# EAGLE board stereo_mix_front (EAGLE 9.5.2)
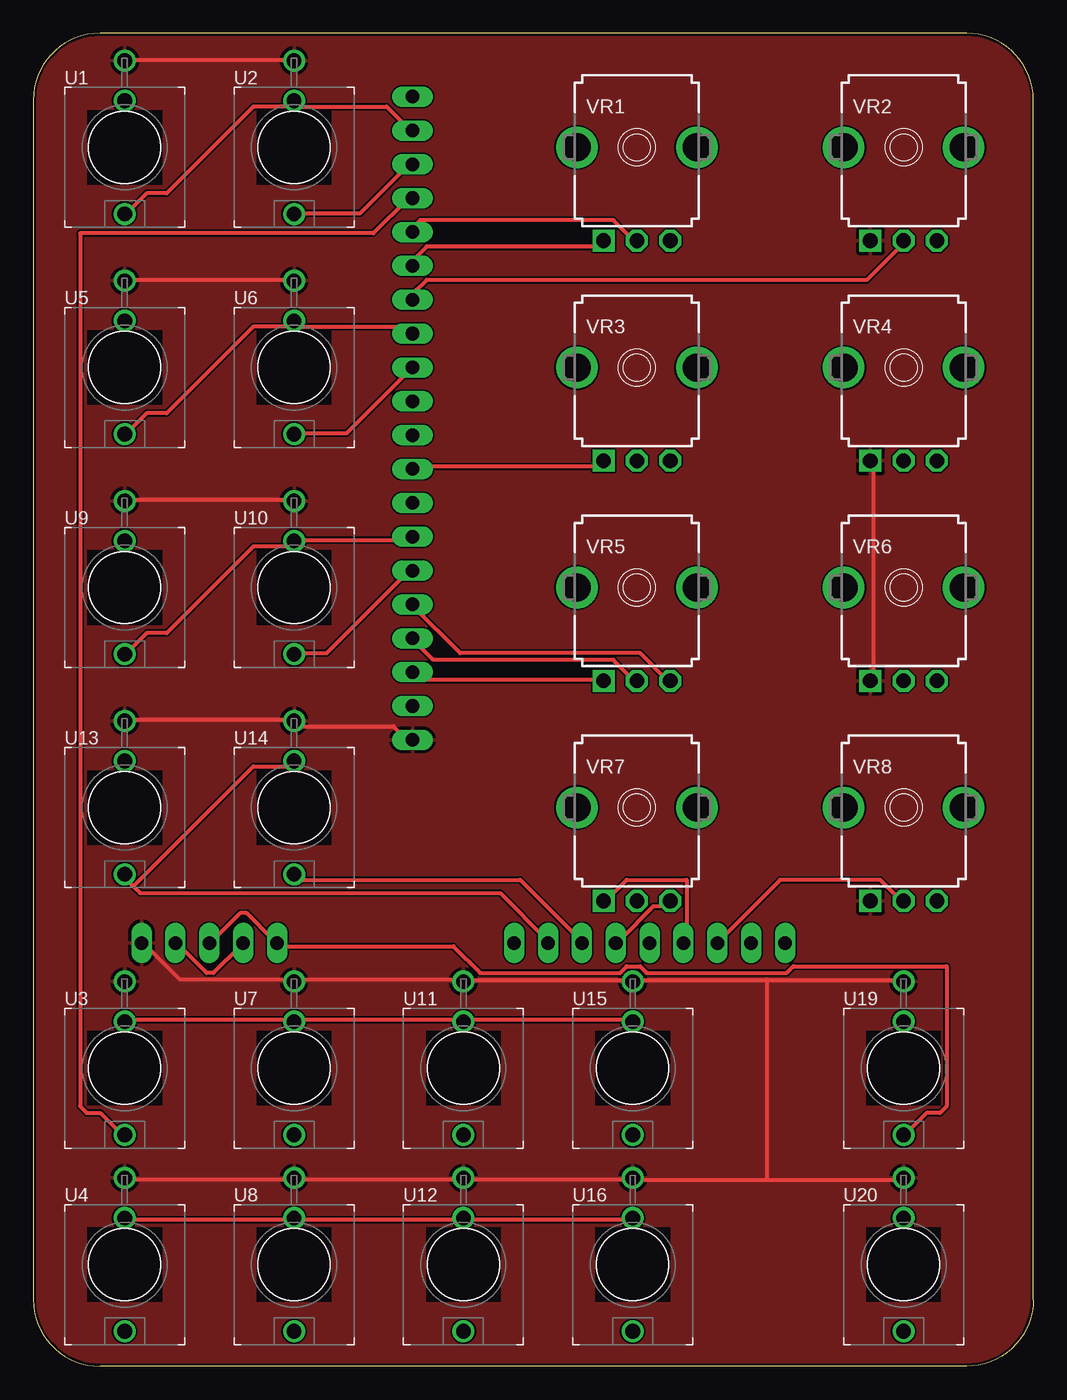
[diagram p0: board, top side]
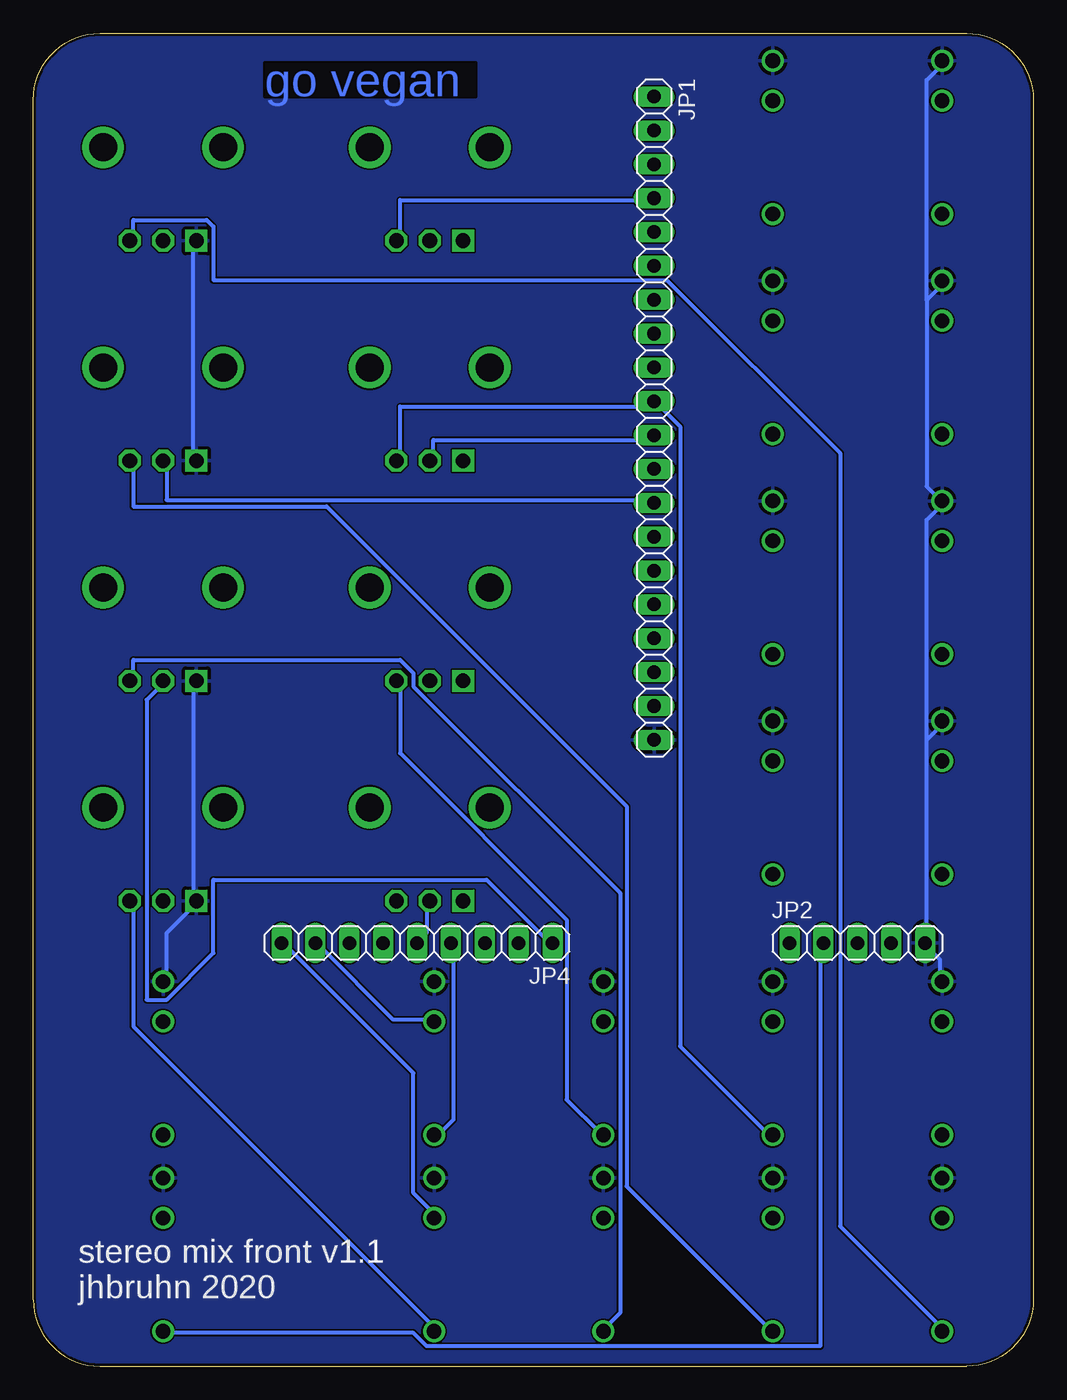
[diagram p1: board, bottom side, seen from below]

Size 75 x 100 mm. Coordinates in mm from the lower left corner, seen from the top.
Outline: 0,95 0,5 arc90 5,0 70,0 arc90 75,5 75,95 arc90 70,100 5,100 arc90 0,95
Copper layers (1*16): Top 0.035559375mm / dielectric 1.6mm / Bottom 0.035559375mm
Design rules "jlcpcb2layer *": minimum track width 12mil, minimum drill 12mil, track to track 5mil, track to pad 5mil, pad to pad 5mil, via to via 5mil, smd to smd 5mil, copper to edge 8mil, drill to drill 6mil, minimum pad ring 5mil, minimum via ring 3mil, stop-mask expansion 2.5mil, vias tented up to drill 0mil, thermal gap 10mil

## Footprints (pad centres in the part's own frame; a part is rotated, then mirrored left to right if it is on the bottom)
1X20 = drill 1.016 long: 1 -24.13,0; 2 -21.59,0; 3 -19.05,0; 4 -16.51,0; 5 -13.97,0; 6 -11.43,0; 7 -8.89,0; 8 -6.35,0; 9 -3.81,0; 10 -1.27,0; 11 1.27,0; 12 3.81,0; 13 6.35,0; 14 8.89,0; 15 11.43,0; 16 13.97,0; 17 16.51,0; 18 19.05,0; 19 21.59,0; 20 24.13,0
1X05 = drill 1.016 long: 1 -5.08,0; 2 -2.54,0; 3 0,0; 4 2.54,0; 5 5.08,0
1X09 = drill 1.016 long: 1 -10.16,0; 2 -7.62,0; 3 -5.08,0; 4 -2.54,0; 5 0,0; 6 2.54,0; 7 5.08,0; 8 7.62,0; 9 10.16,0
WQP-PJ301M-12_JACK = drill 1.1: P$1_TIP 0,5; P$2_SWITCH 0,-3.5; P$3_SLEEVE 0,-6.5
9MM_SNAP-IN_POT = drill 1.1 square: 1 -2.5,-7 | drill 1.1 octagon: 2 0,-7; 3 2.5,-7 | drill 2.1 pad 2.794: CHASSIS1 -4.5,0; CHASSIS2 4.5,0

## Placement (x,y rotation side)
JP1  [1X20]  28.44,71.12 270 bottom
JP2  [1X05]  13.2,31.75 0 bottom
JP4  [1X09]  46.22,31.75 180 bottom
U1  WQP-PJ301M-12_JACK  [WQP-PJ301M-12_JACK]  6.85,91.44 180 top
U2  WQP-PJ301M-12_JACK  [WQP-PJ301M-12_JACK]  19.55,91.44 180 top
U3  WQP-PJ301M-12_JACK  [WQP-PJ301M-12_JACK]  6.85,22.35 180 top
U4  WQP-PJ301M-12_JACK  [WQP-PJ301M-12_JACK]  6.85,7.62 180 top
U5  WQP-PJ301M-12_JACK  [WQP-PJ301M-12_JACK]  6.85,74.93 180 top
U6  WQP-PJ301M-12_JACK  [WQP-PJ301M-12_JACK]  19.55,74.93 180 top
U7  WQP-PJ301M-12_JACK  [WQP-PJ301M-12_JACK]  19.55,22.35 180 top
U8  WQP-PJ301M-12_JACK  [WQP-PJ301M-12_JACK]  19.55,7.62 180 top
U9  WQP-PJ301M-12_JACK  [WQP-PJ301M-12_JACK]  6.85,58.42 180 top
U10  WQP-PJ301M-12_JACK  [WQP-PJ301M-12_JACK]  19.55,58.42 180 top
U11  WQP-PJ301M-12_JACK  [WQP-PJ301M-12_JACK]  32.25,22.35 180 top
U12  WQP-PJ301M-12_JACK  [WQP-PJ301M-12_JACK]  32.25,7.62 180 top
U13  WQP-PJ301M-12_JACK  [WQP-PJ301M-12_JACK]  6.85,41.91 180 top
U14  WQP-PJ301M-12_JACK  [WQP-PJ301M-12_JACK]  19.55,41.91 180 top
U15  WQP-PJ301M-12_JACK  [WQP-PJ301M-12_JACK]  44.95,22.35 180 top
U16  WQP-PJ301M-12_JACK  [WQP-PJ301M-12_JACK]  44.95,7.62 180 top
U19  WQP-PJ301M-12_JACK  [WQP-PJ301M-12_JACK]  65.27,22.35 180 top
U20  WQP-PJ301M-12_JACK  [WQP-PJ301M-12_JACK]  65.27,7.62 180 top
VR1  [9MM_SNAP-IN_POT]  45.27,91.44 0 top
VR2  [9MM_SNAP-IN_POT]  65.27,91.44 0 top
VR3  [9MM_SNAP-IN_POT]  45.27,74.93 0 top
VR4  [9MM_SNAP-IN_POT]  65.27,74.93 0 top
VR5  [9MM_SNAP-IN_POT]  45.27,58.42 0 top
VR6  [9MM_SNAP-IN_POT]  65.27,58.42 0 top
VR7  [9MM_SNAP-IN_POT]  45.27,41.91 0 top
VR8  [9MM_SNAP-IN_POT]  65.27,41.91 0 top

## Library data of the parts
JP1 JP2 JP4 = pinhead
U1-U16 U19 U20 = jhbruhn-physical
VR1-VR8 = jhbruhn-physical; SPICEPREFIX: J

## Nets
1_IN_L: JP1.2 U1.P$1_TIP U2.P$2_SWITCH
1_IN_R: JP1.3 U2.P$1_TIP
1_PAN_ATT_R: JP1.6 VR1.1
1_PAN_ATT_W: JP1.5 VR1.2
1_PAN_CV_IN: JP1.4 U3.P$1_TIP VR1.3
1_VOLUME_CV: JP1.7 VR2.2
2_IN_L: JP1.8 U5.P$1_TIP U6.P$2_SWITCH
2_IN_R: JP1.9 U6.P$1_TIP
2_PAN_ATT_R: JP1.12 VR3.1
2_PAN_ATT_W: JP1.11 VR3.2
2_PAN_CV_IN: JP1.10 U7.P$1_TIP VR3.3
2_VOLUME_CV: JP1.13 VR4.2
3_IN_L: JP1.14 U9.P$1_TIP U10.P$2_SWITCH
3_IN_R: JP1.15 U10.P$1_TIP
3_PAN_ATT_R: JP1.18 VR5.1
3_PAN_ATT_W: JP1.17 VR5.2
3_PAN_CV_IN: JP1.16 U11.P$1_TIP VR5.3
3_VOLUME_CV: JP4.1 VR6.2
4_IN_L: JP4.2 U13.P$1_TIP U14.P$2_SWITCH
4_IN_R: JP4.3 U14.P$1_TIP
4_PAN_ATT_R: JP4.6 VR7.1
4_PAN_ATT_W: JP4.5 VR7.2
4_PAN_CV_IN: JP4.4 U15.P$1_TIP VR7.3
4_VOLUME_CV: JP4.7 VR8.2
+12V: JP1.1
-12V: JP1.19
GND: JP1.20 JP2.5 U1.P$3_SLEEVE U2.P$3_SLEEVE U3.P$3_SLEEVE U4.P$3_SLEEVE U5.P$3_SLEEVE U6.P$3_SLEEVE U7.P$3_SLEEVE U8.P$3_SLEEVE U9.P$3_SLEEVE U10.P$3_SLEEVE U11.P$3_SLEEVE U12.P$3_SLEEVE U13.P$3_SLEEVE U14.P$3_SLEEVE U15.P$3_SLEEVE U16.P$3_SLEEVE U19.P$3_SLEEVE U20.P$3_SLEEVE VR2.1 VR4.1 VR6.1 VR8.1
N$13: U8.P$1_TIP VR4.3
N$17: U4.P$1_TIP VR2.3
N$21: U12.P$1_TIP VR6.3
N$28: U16.P$1_TIP VR8.3
OUT_L: JP2.1 JP2.3 U19.P$1_TIP
OUT_R: JP2.2 JP2.4 U20.P$1_TIP
REF_5: JP4.8 U3.P$2_SWITCH U7.P$2_SWITCH U11.P$2_SWITCH U15.P$2_SWITCH
REF_10: JP4.9 U4.P$2_SWITCH U8.P$2_SWITCH U12.P$2_SWITCH U16.P$2_SWITCH

## Tracks (layer width: path | path; a pad name or v marks a point on that pad's centre or on a via)
1_IN_L
  Top 0.305: JP1.2 28,93 26.5,94.5 20,94.5 U2.P$2_SWITCH 19.5,94.5 16.5,94.5 10,88 8.5,88 7,86.5 U1.P$1_TIP
1_IN_R
  Top 0.305: JP1.3 28,90 24.5,86.5 20,86.5 U2.P$1_TIP
1_PAN_ATT_R
  Top 0.305: JP1.6 28.5,83 29.5,84 42.5,84 VR1.1
1_PAN_ATT_W
  Top 0.305: JP1.5 28.5,85.5 29,86 43.5,86 45,84.5 VR1.2
1_PAN_CV_IN
  Top 0.305: U3.P$1_TIP 6.5,17.5 5,19 4,19 3.5,19.5 3.5,85 25.5,85 28,87.5 JP1.4
  Bottom 0.305: JP1.4 28.5,87.5 47.5,87.5 47.5,84.5 VR1.3
1_VOLUME_CV
  Top 0.305: JP1.7 28.5,80.5 29.5,81.5 62.5,81.5 65,84 VR2.2
2_IN_L
  Top 0.305: JP1.8 28,77.5 27.5,78 20,78 U6.P$2_SWITCH 19.5,78 16.5,78 10,71.5 8.5,71.5 7,70 U5.P$1_TIP
2_IN_R
  Top 0.305: JP1.9 28,74.5 23.5,70 20,70 U6.P$1_TIP
2_PAN_ATT_R
  Top 0.305: JP1.12 28.5,67.5 42.5,67.5 VR3.1
2_PAN_ATT_W
  Bottom 0.305: JP1.11 28.5,69.5 45,69.5 45,68 VR3.2
2_PAN_CV_IN
  Bottom 0.305: VR3.3 47.5,68 47.5,72 28.5,72 JP1.10 28,72 26.5,70.5 26.5,24 20,17.5 U7.P$1_TIP
2_VOLUME_CV
  Bottom 0.305: JP1.13 28.5,65 65,65 65,67.5 VR4.2
3_IN_L
  Top 0.305: JP1.14 28,62 20,62 U10.P$2_SWITCH 19.5,61.5 16.5,61.5 10,55 8.5,55 7,53.5 U9.P$1_TIP
3_IN_R
  Top 0.305: JP1.15 28,59.5 22,53.5 20,53.5 U10.P$1_TIP
3_PAN_ATT_R
  Top 0.305: JP1.18 28.5,52 29,51.5 42.5,51.5 VR5.1
3_PAN_ATT_W
  Top 0.305: JP1.17 28.5,54.5 30,53 43.5,53 45,51.5 VR5.2
3_PAN_CV_IN
  Top 0.305: JP1.16 28.5,57 32,53.5 45.5,53.5 47.5,51.5 VR5.3
  Bottom 0.305: U11.P$1_TIP 32.5,17.5 35,20 35,33.5 47.5,46 47.5,51 VR5.3
3_VOLUME_CV
  Bottom 0.305: JP4.1 36.5,32 41,36.5 61.5,36.5 61.5,31 65,27.5 66.5,27.5 66.5,50 65.5,51 VR6.2
4_IN_L
  Top 0.305: 7.5,36 7,36.5 U13.P$1_TIP | 7.5,36 8,35.5 35,35.5 38.5,32 JP4.2 | 7.5,36 16.5,45 19.5,45 U14.P$2_SWITCH
4_IN_R
  Top 0.305: JP4.3 41,32 36.5,36.5 20,36.5 U14.P$1_TIP
4_PAN_ATT_R
  Top 0.305: JP4.6 49,32 49,36.5 44.5,36.5 43,35 VR7.1
4_PAN_ATT_W
  Bottom 0.305: JP4.5 46,32 45.5,32.5 45.5,34.5 VR7.2
4_PAN_CV_IN
  Top 0.305: JP4.4 44,32 46.5,34.5 47.5,34.5 VR7.3
  Bottom 0.305: U15.P$1_TIP 44.5,17.5 43.5,18.5 43.5,31.5 JP4.4
4_VOLUME_CV
  Top 0.305: JP4.7 51.5,32 56,36.5 63.5,36.5 65,35 VR8.2
GND
  Top 0.305: U4.P$3_SLEEVE 7,14 19.5,14 U8.P$3_SLEEVE 20,14 32,14 U12.P$3_SLEEVE 32.5,14 44.5,14 U16.P$3_SLEEVE 45,14 55,14 | 55,14 65,14 U20.P$3_SLEEVE | VR6.1 63,51.5 63,67.5 VR4.1 | U1.P$3_SLEEVE 7,98 19.5,98 U2.P$3_SLEEVE | U9.P$3_SLEEVE 7,65 19.5,65 U10.P$3_SLEEVE | U5.P$3_SLEEVE 7,81.5 19.5,81.5 U6.P$3_SLEEVE | JP1.20 28,47 27,48 20,48 U14.P$3_SLEEVE 19.5,48.5 7,48.5 U13.P$3_SLEEVE | JP2.5 8.5,31.5 11,29 19.5,29 U7.P$3_SLEEVE 20,29 32,29 U11.P$3_SLEEVE 32.5,29 44.5,29 U15.P$3_SLEEVE 45,29 55,29 | 55,29 65,29 U19.P$3_SLEEVE | 55,29 55,14
  Bottom 0.305: U19.P$3_SLEEVE 65,29 65,32.5 63,34.5 VR8.1 63,35 63,51 VR6.1 | VR2.1 63,84 63,68 VR4.1 | 8,80 8,66 7,65 U9.P$3_SLEEVE 7,64.5 8,63.5 8,47 | 8,80 7,81 U5.P$3_SLEEVE | 8,80 8,96.5 7,97.5 U1.P$3_SLEEVE | U3.P$3_SLEEVE 7,29 7,30.5 8,31.5 JP2.5 8,32 8,47 | 8,47 7,48 U13.P$3_SLEEVE
  pour Top: -5.85,101.6 -5.85,-3.81 76.7,-3.81 76.7,101.6
  pour Bottom: -3.31,100.33 -3.31,-2.54 76.7,-2.54 76.7,101.6 -3.31,101.6
N$13
  Bottom 0.305: U8.P$1_TIP 20,3 30.5,13.5 30.5,42 53,64.5 67.5,64.5 67.5,67.5 VR4.3
N$17
  Bottom 0.305: U4.P$1_TIP 7,3 14.5,10.5 14.5,68.5 27.5,81.5 61.5,81.5 61.5,85.5 62,86 67.5,86 67.5,84.5 VR2.3
N$21
  Bottom 0.305: U12.P$1_TIP 32,3 31,4 31,35.5 46.5,51 46.5,52 47.5,53 67.5,53 67.5,51.5 VR6.3
N$28
  Bottom 0.305: U16.P$1_TIP 45,3 67.5,25.5 67.5,34.5 VR8.3
OUT_L
  Top 0.305: JP2.3 13.5,32 15.5,34 16,34 18,32 JP2.1 18.5,31.5 31.5,31.5 33.5,29.5 44,29.5 44.5,30 45.5,30 46,29.5 56.5,29.5 57,30 68.5,30 68.5,19.5 68,19 67,19 65.5,17.5 U19.P$1_TIP
OUT_R
  Top 0.305: JP2.4 11,31.5 13,29.5 13.5,29.5 15.5,31.5 JP2.2
  Bottom 0.305: U20.P$1_TIP 65,2.5 46.5,2.5 45.5,1.5 16,1.5 16,31.5 JP2.2
REF_5
  Top 0.305: U3.P$2_SWITCH 7,26 19.5,26 U7.P$2_SWITCH 20,26 32,26 U11.P$2_SWITCH 32.5,26 44.5,26 U15.P$2_SWITCH
  Bottom 0.305: JP4.8 53.5,31.5 48,26 45,26 U15.P$2_SWITCH
REF_10
  Top 0.305: U4.P$2_SWITCH 7,11 19.5,11 U8.P$2_SWITCH 20,11 32,11 U12.P$2_SWITCH 32.5,11 44.5,11 U16.P$2_SWITCH
  Bottom 0.305: JP4.9 56,31.5 46.5,22 46.5,13 45,11.5 U16.P$2_SWITCH

## Text on the board
Bottom: go vegan
bNames: stereo mix front v1.1 / jhbruhn 2020
bStop: go vegan